# Altium PCB PCB_RGBlimp-Q_Subplate.pcbdoc
Units mm, origin at the board's own origin, x right, y up, seen from the top; angles counter-clockwise.
Board outline 53.72 x 45.85 mm, 2 copper layers (Top Layer, Bottom Layer); 7 components, 11 nets, 40 pads, 15 vias.
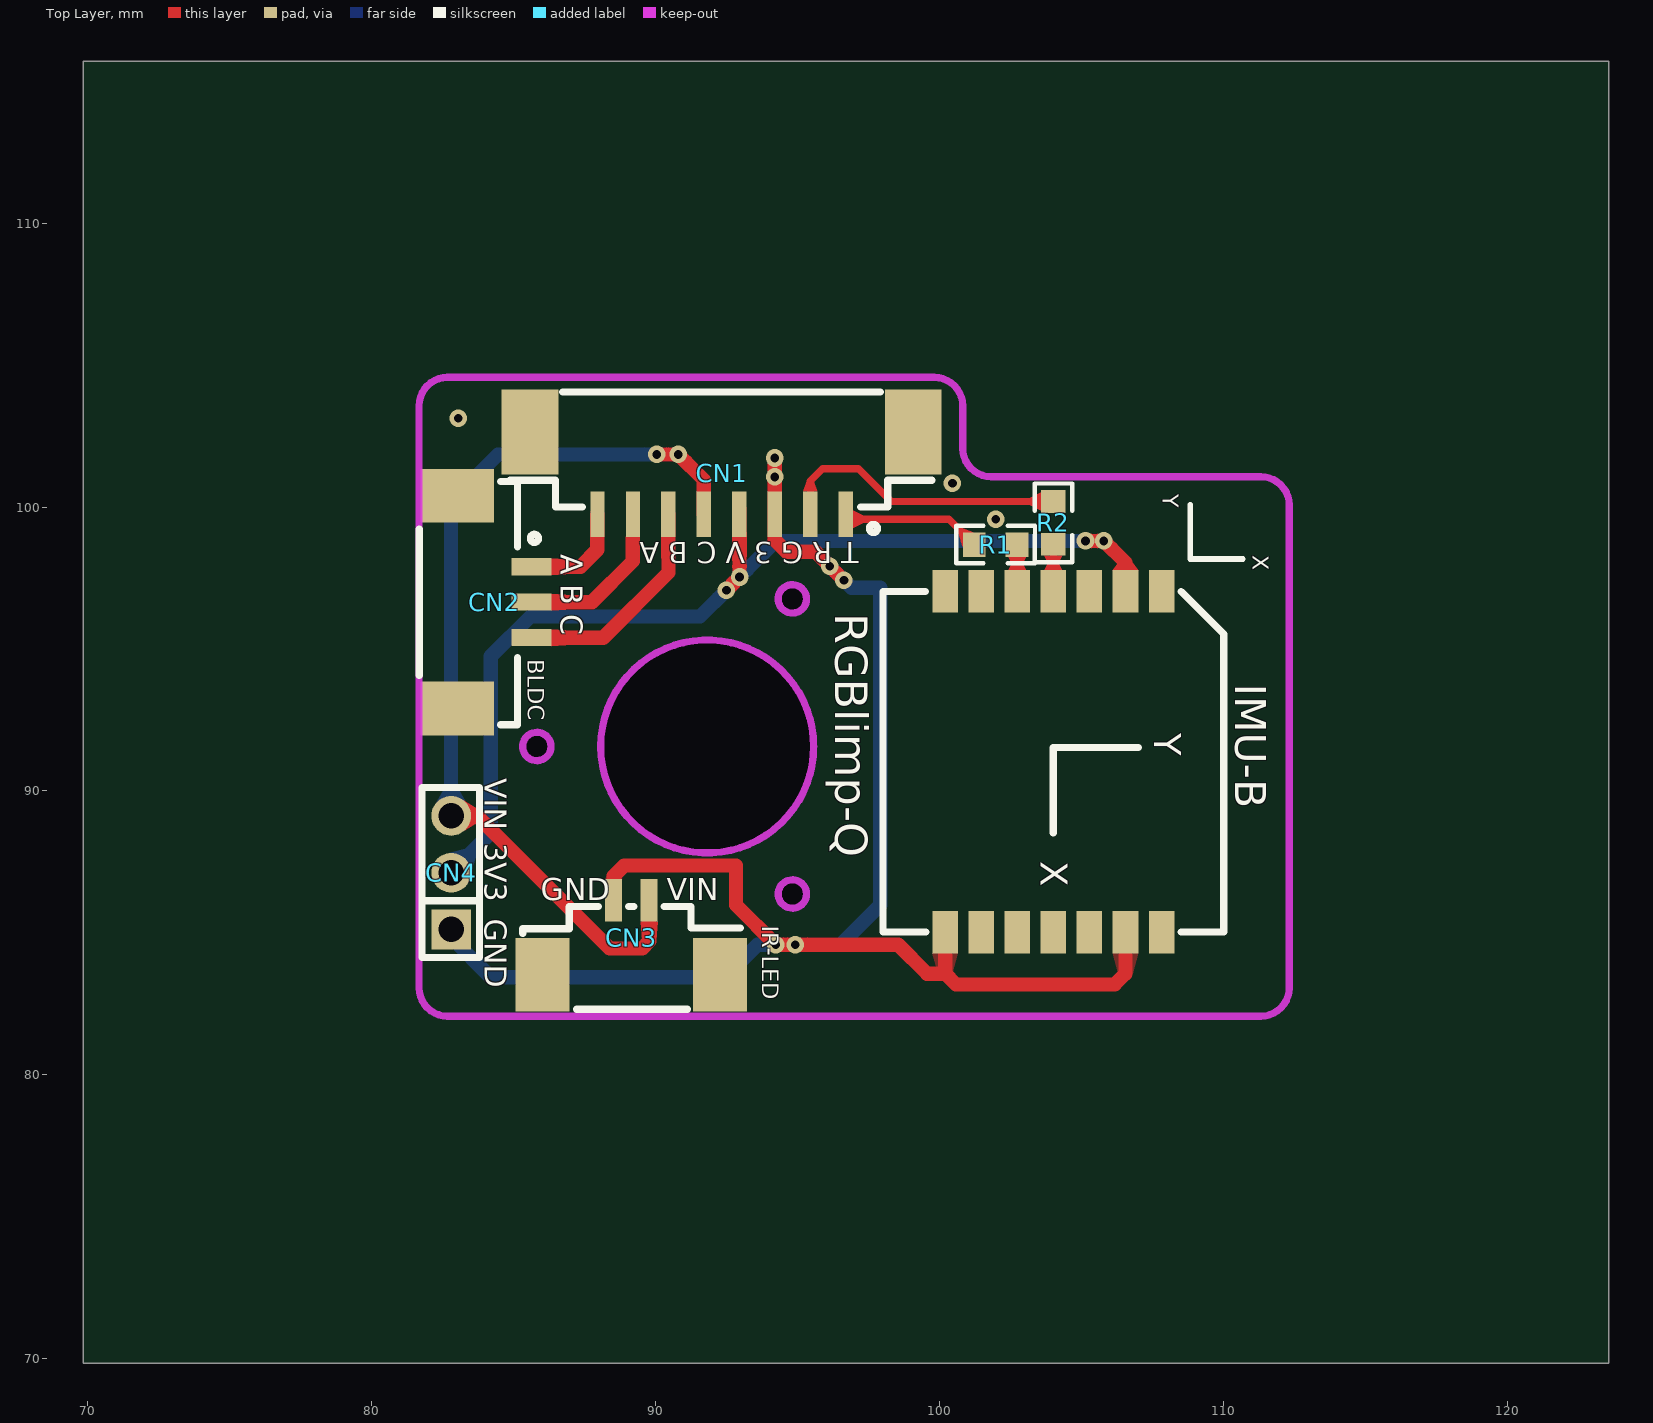
[diagram p0: Top Layer view]
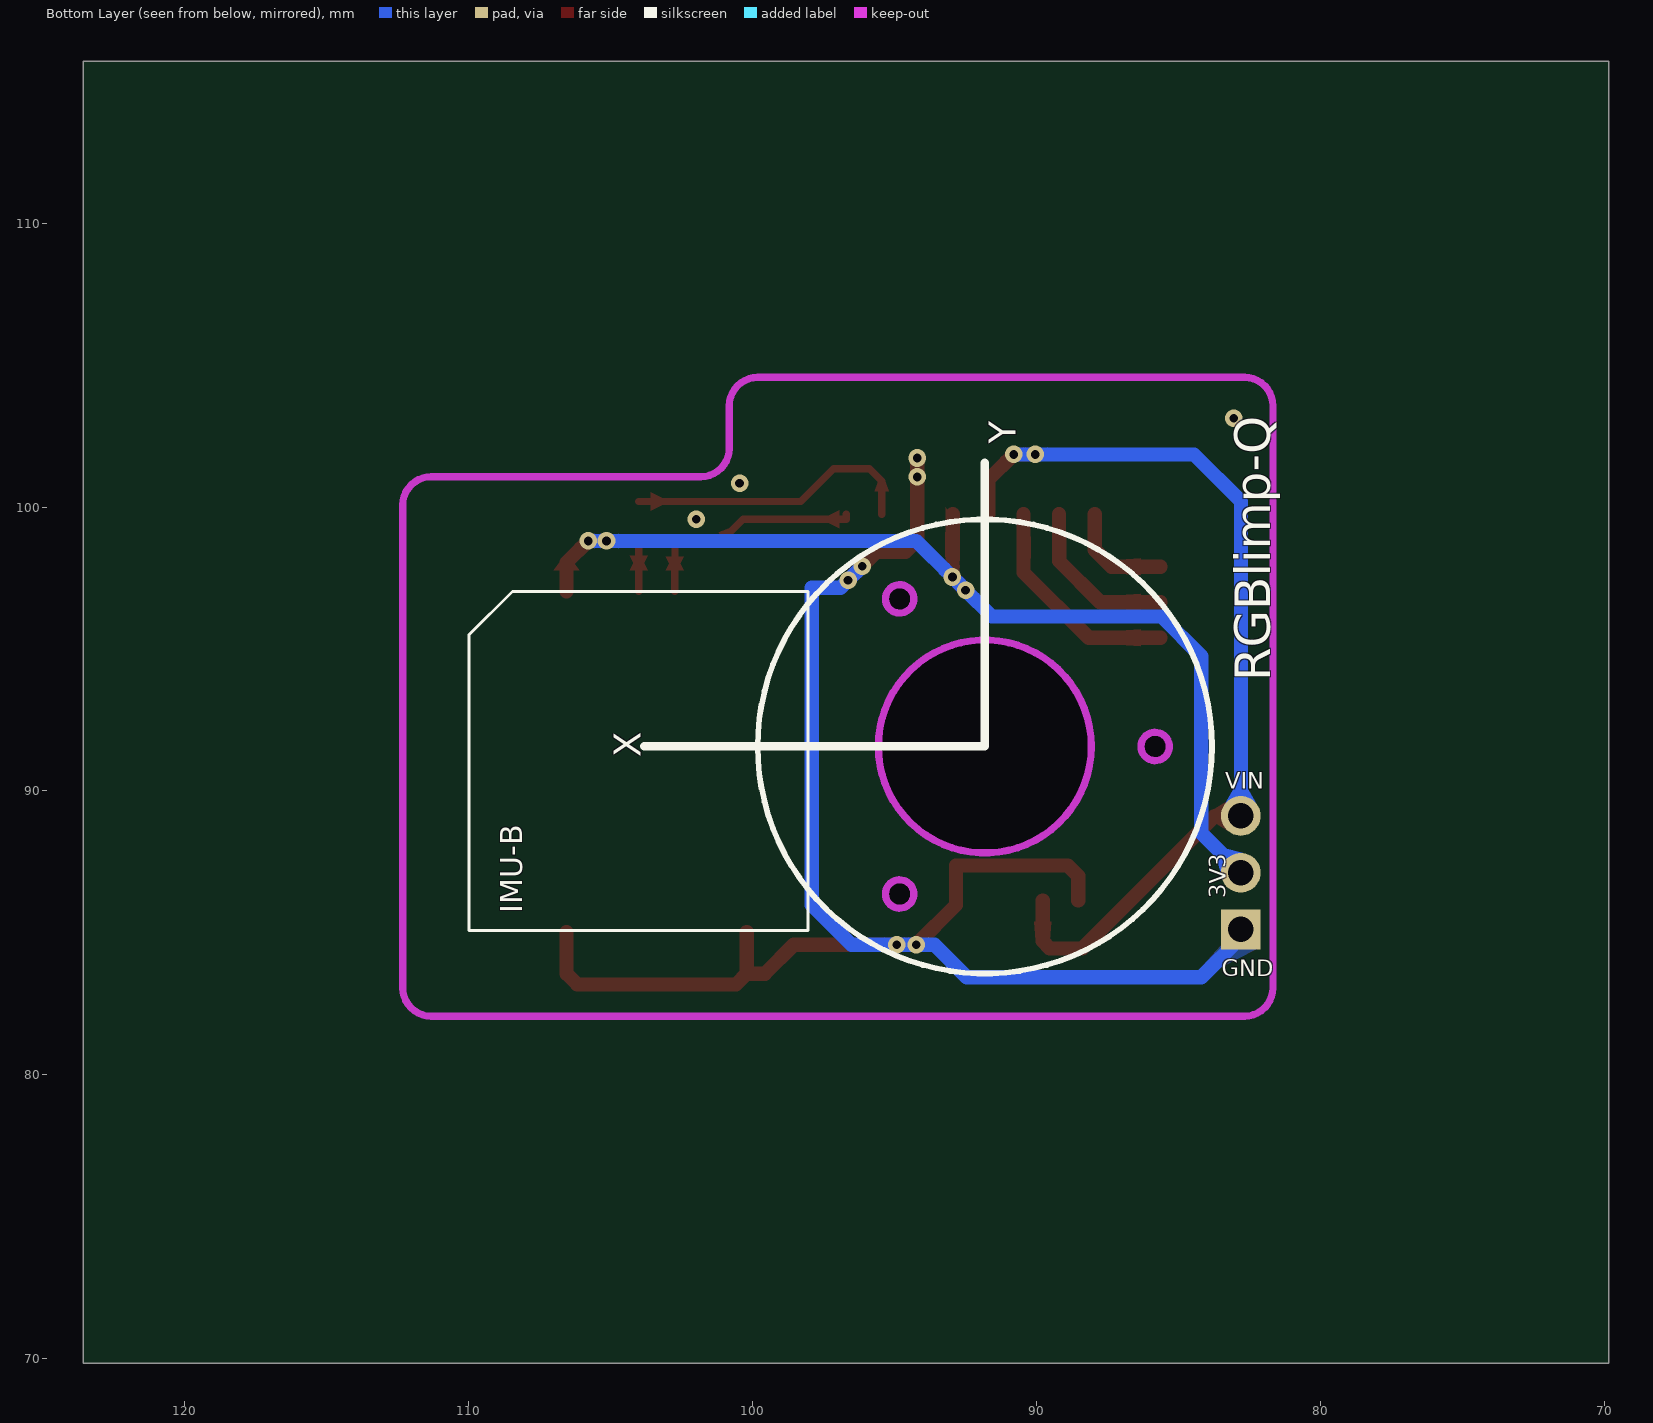
[diagram p1: Bottom Layer view, seen from below]

## Layer stack, top to bottom
Top Layer: signal copper (thickness not stored)
Dielectric: dielectric 0.32, FR-4, Dk 4.8
Bottom Layer: signal copper (thickness not stored)

## Board outline
123.571,69.85 69.85,69.85 69.85,115.697 123.571,115.697
cut-out: 95.321,86.371 ccw(c94.821,86.363) 94.321,86.371 ccw(c94.821,86.379)
cut-out: 95.321,96.763 ccw(c94.821,96.755) 94.321,96.763 ccw(c94.821,96.771)
cut-out: 95.571,91.567 ccw(c91.821,91.567) 88.071,91.567 ccw(c91.821,91.567)
cut-out: 86.321,91.567 ccw(c85.821,91.559) 85.321,91.567 ccw(c85.821,91.575)

## Design rules (kind name [scope] priority, off if disabled: settings)
Clearance Default [All] p1: gap=0.178 ignorepadtopadclearanceinfootprint=FALSE except(0: Region-Region; 0.152: Track-Track Track-SMDPad SMDPad-SMDPad Track-THPad SMDPad-THPad THPad-THPad Track-Via SMDPad-Via THPad-Via Via-Via Track-Fill SMDPad-Fill THPad-Fill Via-Fill Fill-Fill Track-Region SMDPad-Region THPad-Region Via-Region Fill-Region Track-Poly SMDPad-Poly THPad-Poly Via-Poly Fill-Poly Region-Poly Poly-Poly Track-Text SMDPad-Text THPad-Text Via-Text Fill-Text Region-Text Poly-Text Text-Text Track-Sheet SMDPad-Sheet THPad-Sheet Via-Sheet Fill-Sheet Region-Sheet Poly-Sheet Text-Sheet Track-Hole SMDPad-Hole THPad-Hole Via-Hole Fill-Hole Region-Hole Poly-Hole Text-Hole Sheet-Hole)
DiffPairsRouting differentialPair [All] p1: maxuncoupledlength=10 minlimit=6 maxlimit=50 mostfreqgap=6 toplayer_minwidth=5 toplayer_prefwidth=10 toplayer_maxwidth=100 bottomlayer_minwidth=5 bottomlayer_prefwidth=10 bottomlayer_maxwidth=100
PasteMaskExpansion Common [All] p1: expansion=0
PlaneConnect Default [All] p1: planeconnectstyle=Relief reliefexpansion=0.508 reliefentries=4 reliefconductorwidth=0 reliefairgap=0.254
PolygonConnect Default [All] p1: connectstyle=Relief reliefentries=4 reliefconductorwidth=0 polygonreliefangle="90 Angle" airgapwidth=10
PolygonConnect gge1691 [All] p1: connectstyle=Relief reliefentries=4 reliefconductorwidth=0 polygonreliefangle="90 Angle" airgapwidth=10
PolygonConnect gge1691(1) [All] p1: connectstyle=Relief reliefentries=4 reliefconductorwidth=0 polygonreliefangle="90 Angle" airgapwidth=10
RoutingVias Default [All] p1: viastyle="Through Hole" holewidth=12.008 minholewidth=12.008 maxholewidth=2362 width=24.016 minwidth=24.016 maxwidth=3938
SolderMaskExpansion Common [All] p1: useseparateexpansions=TRUE expansion=2 expansionbottom=2
Width Default [All] p1: maxlimit=1000 minlimit=10 preferedwidth=10

## Components (designator, comment, footprint, x,y, rotation, side; value= is the part's Value field where it differs from the comment)
CN1 "AFC12-S08CCC-00" CONN-SMD_8P-P1.25-V-M_AFC12-S08CCC-00-TAOBAO 92.329,101.346 r180 top
CN2 "AFC12-S03CCC-00" CONN-SMD_AFC12-S03CCC-00 84.328,96.647 r270 top
CN3 "AFC12-S02CCC-00" CONN-SMD_AFC12-S02CCC-00 89.154,84.836 r0 top
CN4 "A2005WV-3P" HDR-TH_3P-P2.00-V-M 82.804,87.122 r90 top
IMU-B "HI229" HI229 104.013,91.567 r270 top
R1 "120Ω" R0603 101.981,98.679 r0 top
R2 "120Ω" R0603 104.013,99.441 r270 top

## Footprints (in the part's own frame and the unit in brackets; to place one, negate y for a bottom-side part, rotate by r counter-clockwise, add the part's x,y. Pads: shape width x height; smd on the part's side, far side on the other; paste and mask are expansions set on the pad)
CONN-SMD_8P-P1.25-V-M_AFC12-S08CCC-00-TAOBAO [mm]
  rect 0.5x1.6 smd: 1(-4.375,1.597) 2(-3.125,1.597) 3(-1.875,1.597) 4(-0.625,1.597) 5(0.625,1.597) 6(1.875,1.597) 7(3.125,1.597) 8(4.375,1.597)
  rect 2x3 smd: 9(6.75,-1.3) 10(-6.75,-1.3)
  silkscreen extent -7.4,-2.7 7.45,2.24
CONN-SMD_AFC12-S02CCC-00 [mm]
  rect 0.6x1.5 smd: 1(-0.625,1.309) 2(0.625,1.309)
  rect 1.9x2.6 smd: 3(3.125,-1.309) 4(-3.125,-1.309)
  silkscreen extent -3.83,-2.52 3.84,1.1
CONN-SMD_AFC12-S03CCC-00 [mm]
  rect 0.6x1.4 smd: 1(-1.25,1.309) 2(0,1.309) 3(1.25,1.309)
  rect 1.9x2.6 smd: 4(3.75,-1.309) 5(-3.75,-1.309)
  silkscreen extent -4.25,-2.65 4.32,1.55
HDR-TH_3P-P2.00-V-M [mm]
  rect 1.4x1.4 hole 0.9: 1(-2,0)
  round 1.4 hole 0.9: 2(0,0) 3(2,0)
  silkscreen extent -2.99,-1 3,1.03
HI229 [mm]
  rect 1.5x0.9 smd: 1(-5.461,3.81) 2(-5.461,2.54) 3(-5.461,1.27) 4(-5.461,0) 5(-5.461,-1.27) 6(-5.461,-2.54) 7(-5.461,-3.81) 8(6.539,-3.81) 9(6.539,-2.54) 10(6.539,-1.27) 11(6.539,0) 12(6.539,1.27) 13(6.539,2.54) 14(6.539,3.81)
  silkscreen extent -5.46,-6 6.54,6
R0603 [mm]
  rect 0.806x0.864 smd: 1(-0.753,0) 2(0.753,0)
  silkscreen extent -1.39,-0.66 1.39,0.66

## Via types
v1: diameter 0.62, hole 0.31, Top Layer to Bottom Layer, 15 vias

## Nets (pads, with @x,y where several pads share a name; then routed paths per layer and width w, separated by ;. In a path a pad name is that pad's centre, name@x,y a point inside that pad or via, vN(x,y) a via of type N, cw(c..) or ccw(c..) an arc to the next point about the centre after c; other vN are vias at no path point)
3V3: CN1.4 CN4.2 IMU-B.2 | length 37.1
  Top Layer w0.5: v1(92.498,97.07) v1(92.964,97.536) CN1.4 ; v1(105.146,98.806) v1(105.791,98.806) 106.553,98.044 IMU-B.2
  Bottom Layer w0.5: CN4.2 84.201,88.519 84.201,94.742 85.598,96.139 91.567,96.139 v1(92.498,97.07) v1(92.964,97.536) 94.234,98.806 v1(105.146,98.806) v1(105.791,98.806)
CN1_1: CN1.1 R1.1 | length 5.1
  Top Layer w0.254: CN1.1 96.703,99.568 100.338,99.568 R1.1
CN1_2: CN1.2 R2.1 | length 10.4
  Top Layer w0.254: CN1.2 95.453,100.914 95.885,101.346 97.155,101.346 98.306,100.195 R2.1
CN1_6: CN1.6 CN2.3 | length 7.8
  Top Layer w0.5: CN2.3 88.158,95.397 90.454,97.693 CN1.6
CN1_7: CN1.7 CN2.2 | length 5.8
  Top Layer w0.5: CN2.2 87.757,96.647 89.205,98.095 CN1.7
CN1_8: CN1.8 CN2.1 | length 3.8
  Top Layer w0.5: CN2.1 87.356,97.897 87.953,98.494 CN1.8@87.953,99.748
GND: CN1.3 CN3.1 CN4.1 IMU-B.8 IMU-B.13 | length 61.6
  Top Layer w0.5: CN3.1 88.529,87.005 88.9,87.376 92.837,87.376 92.837,85.979 v1(94.234,84.582) v1(94.92,84.582) 98.552,84.582 99.568,83.566 100.203,83.566 ; v1(94.204,101.06) CN1.3 94.204,98.836 94.615,98.425 95.631,98.425 v1@96.639,97.417 ; v1(94.204,101.06) v1(94.204,101.727) ; IMU-B.8 100.203,83.566 ; IMU-B.13 106.553,83.566 106.172,83.185 100.584,83.185 100.203,83.566
  Bottom Layer w0.5: CN4.1 82.804,84.836 84.201,83.439 92.456,83.439 93.599,84.582 v1(94.234,84.582) ; v1(96.139,97.917) v1(96.638,97.418) 96.901,97.155 97.917,97.155 97.917,85.979 96.52,84.582 v1(94.92,84.582) ; v1(94.234,84.582) v1(94.92,84.582) ; v1(94.234,84.582) v1(94.92,84.582)
  other v1: 101.981,99.568 100.457,100.838 83.058,103.124
IMU-B_7: IMU-B.7
R1_2: IMU-B.5 R1.2 | length 1.7
  Top Layer w0.254: R1.2 IMU-B.5
R2_2: IMU-B.4 R2.2 | length 1.7
  Top Layer w0.254: IMU-B.4 R2.2
VIN: CN1.5 CN3.2 CN4.3 | length 33.5
  Top Layer w0.5: CN4.3 83.726,89.121 88.392,84.455 89.535,84.455 89.779,84.719 CN3.2 ; v1(90.043,101.854) v1(90.805,101.854) 91.704,100.955 CN1.5
  Bottom Layer w0.5: CN4.3 82.804,100.203 84.455,101.854 v1(90.043,101.854) v1(90.805,101.854)
pads on no net: CN1.9 CN1.10 CN2.4 CN2.5 CN3.3 CN3.4 IMU-B.1 IMU-B.3 IMU-B.6 IMU-B.9 IMU-B.10 IMU-B.11 IMU-B.12 IMU-B.14

## Polygon pours and split planes (outlines as drawn)
GND on Top Layer (solid, remove dead copper, pour order 0): 76.581,109.347 117.221,109.347 117.221,76.327 76.581,76.327 76.581,85.598 76.2,85.979
GND on Bottom Layer (solid, remove dead copper, pour order 2): 76.581,109.22 117.221,109.22 117.221,76.2 76.581,76.2 76.581,85.471 76.2,85.852

## Keep-outs
Board Outline Layer:
  lines w0.254: 82.671,104.567 99.821,104.567 ; 82.676,104.567 ccw(c82.676,103.567) 81.676,103.567 81.676,83.067 ccw(c82.676,83.067) 82.676,82.067 82.671,82.067 111.321,82.067 ; 99.821,104.567 cw(c99.821,103.567) 100.821,103.567 ; 99.821,104.567 99.821,104.567 ; 100.821,102.067 ccw(c101.821,102.067) 101.821,101.067 ; 100.821,102.067 100.821,102.067 ; 100.821,102.067 100.821,103.567 ; 100.821,103.567 100.821,103.567 ; 101.821,101.067 111.321,101.067 ; 101.821,101.067 101.821,101.067 ; 111.321,82.067 111.321,82.067 ; 111.321,82.067 ccw(c111.321,83.067) 112.321,83.067 ; 111.321,101.067 cw(c111.321,100.067) 112.321,100.067 ; 111.321,101.067 111.321,101.067 ; 112.321,83.067 112.321,83.067 ; 112.321,83.067 112.321,100.067 ; 112.321,100.067 112.321,100.067
Multi-Layer:
  circle w0.254: c94.821,86.371 r0.5
  circle w0.254: c94.821,96.763 r0.5
  circle w0.254: c91.821,91.567 r3.75
  circle w0.254: c85.821,91.567 r0.5

## Other copper
Top Layer:
  region net VIN: 83.267,88.597 83.267,89.647 83.725,89.372 83.725,88.872
  region net 3V3: 93.196,97.742 92.731,97.74 92.712,97.957 93.212,97.959
  region net 3V3: 92.983,97.227 92.655,97.555 92.489,97.414 92.842,97.061
  region net 3V3: 92.808,97.051 92.479,97.38 92.62,97.546 92.974,97.192
  region net 3V3: 106.1,98.825 105.772,98.497 105.913,98.331 106.266,98.684
  region net 3V3: 105.586,98.573 105.586,99.039 105.369,99.056 105.369,98.556
  region net 3V3: 105.351,98.573 105.351,99.039 105.568,99.056 105.568,98.556
  region net VIN: 90.248,101.621 90.248,102.087 90.465,102.104 90.465,101.604
  region net VIN: 91.114,101.873 90.786,101.545 90.927,101.379 91.28,101.732
  region net VIN: 90.6,101.621 90.6,102.087 90.383,102.104 90.383,101.604
  region net CN1_7: 89.454,98.949 88.954,98.949 88.954,98.199 89.454,98.199
  region net CN1_8: 88.204,98.949 87.704,98.949 87.704,98.495 88.204,98.495
  region net CN1_6: 90.704,98.949 90.204,98.949 90.204,98.199 90.704,98.199
  region net VIN: 91.454,100.549 91.954,100.549 91.954,100.955 91.454,100.955
  region net 3V3: 93.204,99.987 92.704,98.949 92.715,97.245 93.211,98.272
  region net CN1_2: 95.204,100.549 95.704,100.549 95.581,100.915 95.327,100.915
  region net CN1_1: 96.954,99.885 96.954,99.251 97.335,99.441 97.335,99.695
  region net 3V3: 106.103,97.777 107.003,97.777 106.803,98.044 106.303,98.044
  region net R2_2: 103.695,97.777 104.331,97.777 104.14,98.158 103.886,98.158
  region net R1_2: 102.422,97.777 103.057,97.777 102.865,98.158 102.611,98.158
  region net R1_2: 103.055,98.247 102.42,98.247 102.612,97.866 102.866,97.866
  region net CN1_1: 100.825,98.596 101.197,99.111 100.831,99.255 100.68,99.047
  region net R2_2: 104.331,98.285 103.695,98.285 103.886,97.904 104.14,97.904
  region net CN1_2: 103.581,100.512 103.581,99.877 103.2,100.067 103.2,100.321
  region net CN1_8: 86.337,98.197 86.337,97.597 87.087,97.647 87.087,98.147
  region net CN1_7: 86.337,96.947 86.337,96.347 87.087,96.397 87.087,96.897
  region net CN1_6: 86.337,95.697 86.337,95.097 87.087,95.147 87.087,95.647
  region net VIN: 90.079,85.395 89.479,85.395 89.529,84.719 90.029,84.719
Bottom Layer:
  region net 3V3: 82.76,87.821 83.503,87.078 83.655,87.619 83.301,87.973
  region net VIN: 83.329,89.585 82.279,89.585 82.554,90.075 83.054,90.075
  region net 3V3: 93.273,97.517 92.945,97.845 93.086,98.011 93.439,97.658
  region net 3V3: 92.983,97.227 92.655,97.555 92.489,97.414 92.842,97.061
  region net 3V3: 92.518,96.761 92.189,97.09 92.023,96.949 92.377,96.595
  region net 3V3: 92.808,97.051 92.479,97.38 92.62,97.546 92.974,97.192
  region net 3V3: 105.586,98.573 105.586,99.039 105.369,99.056 105.369,98.556
  region net 3V3: 104.94,98.573 104.94,99.039 104.723,99.056 104.723,98.556
  region net 3V3: 105.351,98.573 105.351,99.039 105.568,99.056 105.568,98.556
  region net VIN: 89.838,101.621 89.838,102.087 89.621,102.104 89.621,101.604
  region net VIN: 90.248,101.621 90.248,102.087 90.465,102.104 90.465,101.604
  region net VIN: 90.6,101.621 90.6,102.087 90.383,102.104 90.383,101.604

## Silkscreen, mask and mechanical layers (free items; w line width, h text height)
Top Silkscreen Layer:
  lines w0.2: 108.839,98.171 110.689,98.171 109.54,98.171 ; 108.839,98.176 108.839,100.076
  text "Y" at 107.858,100.457 h0.57 r270
  text "T R G 3 V C B A" at 97.152,98.765 h0.73 r180
  text "A B C" at 86.657,98.337 h0.77 r270
  text "X" at 111.033,98.298 h0.57 r270
  text "RGBlimp-Q" at 96.331,96.253 h1.15 r270
  text "BLDC" at 85.503,94.637 h0.57 r270
  text "VIN" at 83.99,90.444 h0.77 r270
  text "3V3" at 83.99,88.158 h0.77 r270
  text "GND" at 85.959,86.149 h0.77
  text "VIN" at 90.404,86.149 h0.77
  text "GND" at 83.99,85.491 h0.77 r270
  text "IR-LED" at 93.758,85.253 h0.57 r270
Bottom Silkscreen Layer:
  circle w0.2: c91.821,91.567 r8
  lines w0.1: 98.044,85.09 109.982,85.09 109.982,95.504 108.458,97.028 98.044,97.028 98.044,85.09
  lines w0.3: 91.821,101.567 91.821,91.567 102.053,91.567 103.821,91.567
  text "Y" at 90.733,102.235 h0.95 r270
  text "RGBlimp-Q" at 81.769,93.857 h1.24 r270
  text "X" at 103.941,91.186 h0.95 r270
  text "VIN" at 83.356,90.075 h0.57
  text "3V3" at 83.333,86.218 h0.57 r270
  text "IMU-B" at 108.104,85.686 h0.77 r270
  text "GND" at 83.483,83.471 h0.57
Mechanical Layer:
  circle w0.025: c94.821,86.371 r0.5
  circle w0.025: c94.821,96.763 r0.5
  circle w0.025: c91.821,91.567 r3.75
  circle w0.025: c85.821,91.567 r0.5

## Text inside footprints (layer, text, board x,y; h text height)
IMU-B: Top Silkscreen Layer "X" at 103.571,87.528 h0.95 r270; Top Silkscreen Layer "Y" at 107.571,92.028 h0.95 r270